# Altium PCB pcb.PcbDoc (part 2 of 3)
Units mm, origin at the board's own origin, x right, y up, seen from the top; angles counter-clockwise.
Board outline 134 x 85 mm, 2 copper layers (Top Layer, Bottom Layer), stack 1.576 mm thick; 95 components, 38 nets, 258 pads, 1810 vias.
Unrouted connection lines stored in the file: 41.
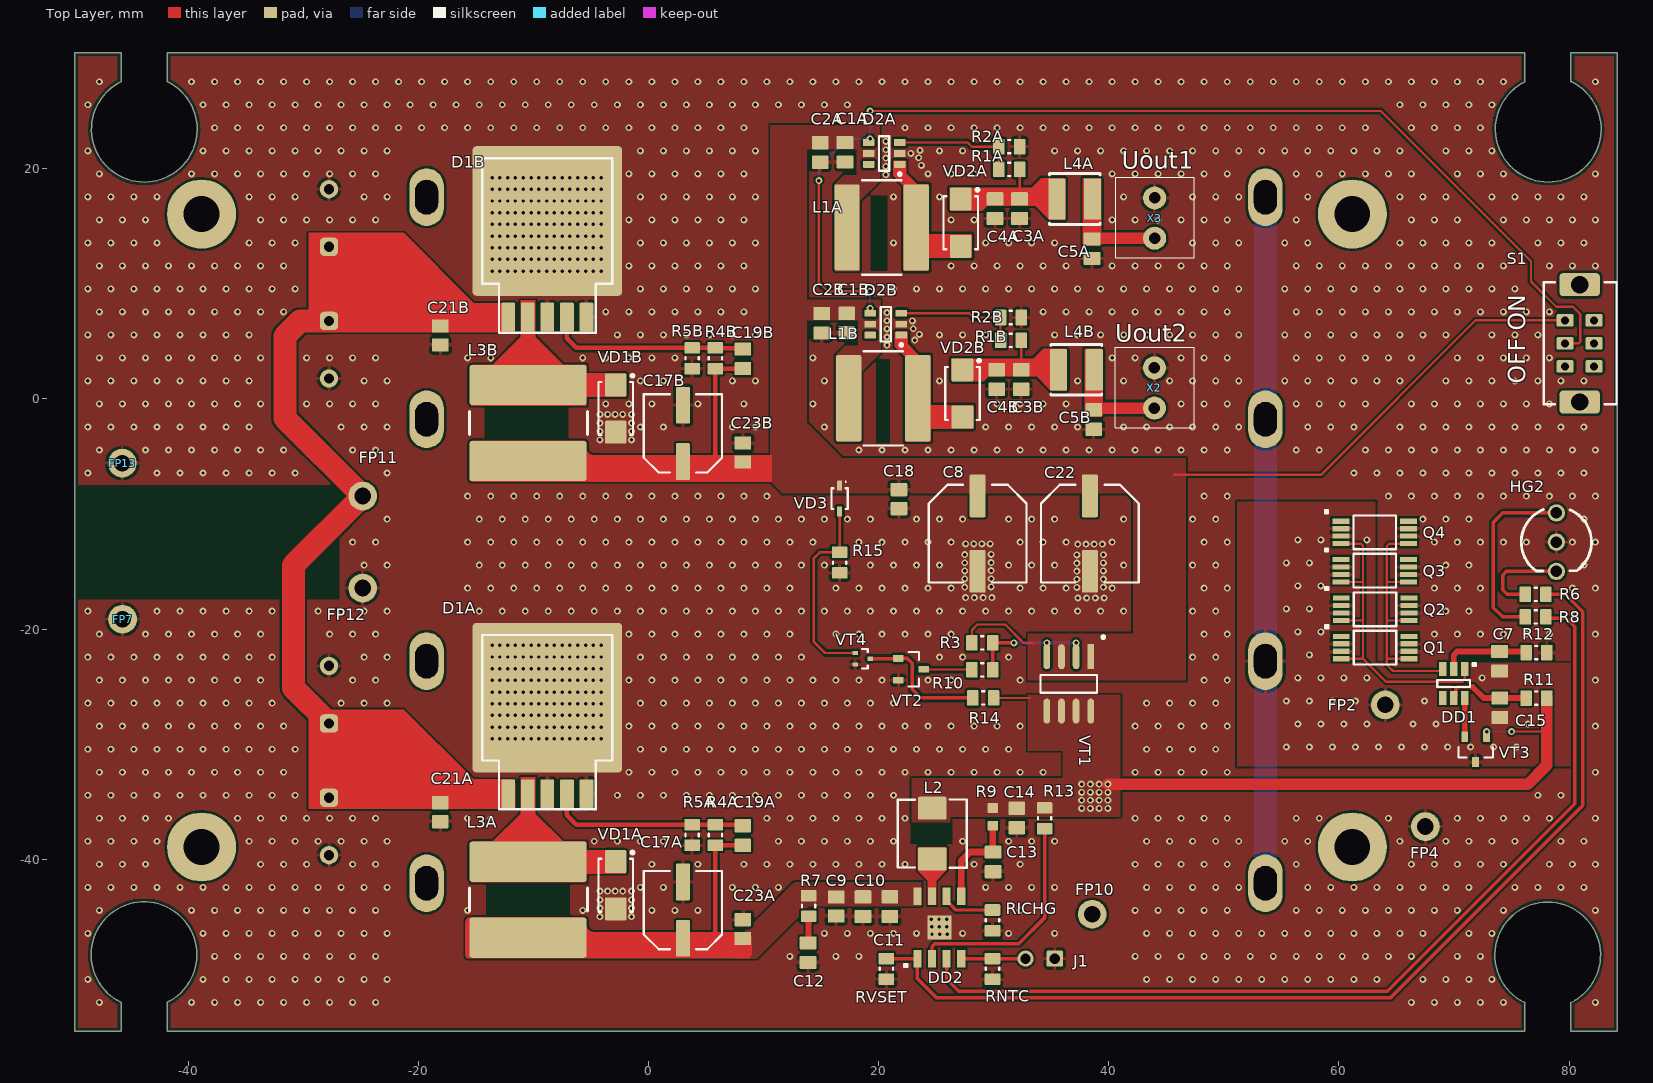
[diagram p0: Top Layer view]

## Via types
v1: diameter 0.6, hole 0.3, Top Layer to Bottom Layer, tented both sides, 1810 vias

## Nets (pads, with @x,y where several pads share a name; then routed paths per layer and width w, separated by ;. In a path a pad name is that pad's centre, name@x,y a point inside that pad or via, vN(x,y) a via of type N, cw(c..) or ccw(c..) an arc to the next point about the centre after c; other vN are vias at no path point) (continued)
BGND: (continued)
  other v1: 55.436,-30.251 57.436,-30.251 59.436,-30.251 61.436,-30.251 63.436,-30.251 65.436,-30.251 67.436,-30.251 69.436,-30.251 71.436,-30.251 73.436,-30.251 75.436,-30.251 56.436,-28.251 58.436,-28.251 60.436,-28.251 62.436,-28.251 66.436,-28.251 68.436,-28.251 76.436,-28.251 55.436,-26.251 57.436,-26.251 59.436,-26.251 61.436,-26.251 67.436,-26.251 56.436,-24.251 58.436,-24.251 60.436,-24.251 62.436,-24.251 72.436,-24.251 76.436,-24.251 57.436,-22.251 56.436,-20.251 58.436,-20.251 55.436,-18.251 57.436,-18.251 56.436,-16.251 58.436,-16.251 55.436,-14.251 57.436,-14.251 56.436,-12.251 58.436,-12.251 62.436,-12.251
D1: DD2.1 R6.2 RVSET.2 | length 90.5
  Top Layer w0.2: DD2.1@23.363,-48.63 DD2.1@23.368,-48.635
  Top Layer w0.3: RVSET.2@20.676,-48.63 DD2.1@23.363,-48.63 ; DD2.1@23.368,-48.635 23.368,-50.368 25.019,-52.019 64.491,-52.019 81.178,-35.331 81.178,-18.491 79.68,-16.993 R6.2@77.989,-16.993
D2: DD2.3 R8.2 | length 81.8
  Top Layer w0.3: DD2.3@25.908,-48.635 25.908,-50.419 26.957,-51.468 64.204,-51.468 80.493,-35.179 80.493,-19.812 79.729,-19.048 78.089,-19.048 R8.2@77.989,-18.948
EN_STEP_UP: D2A.4 D2B.4 S1.5 | length 98.1
  Top Layer w0.2: v1(14.808,18.974) 14.808,10.109 15.57,9.347 v1(19.253,9.347) ; v1(19.253,25.019) 63.627,25.019 76.683,11.963 76.683,10.211 78.892,8.001 80.34,8.001 80.975,7.366 80.975,4.943 80.858,4.826 S1.5@79.649,4.826
  Bottom Layer w0.2: v1(14.808,18.974) 14.808,20.168 17.247,22.606 v1(19.253,22.606) v1(19.253,25.019) ; v1(19.253,7.874) v1(19.253,9.347) v1@19.304,9.398